# EAGLE board v1 (EAGLE 9.4.1)
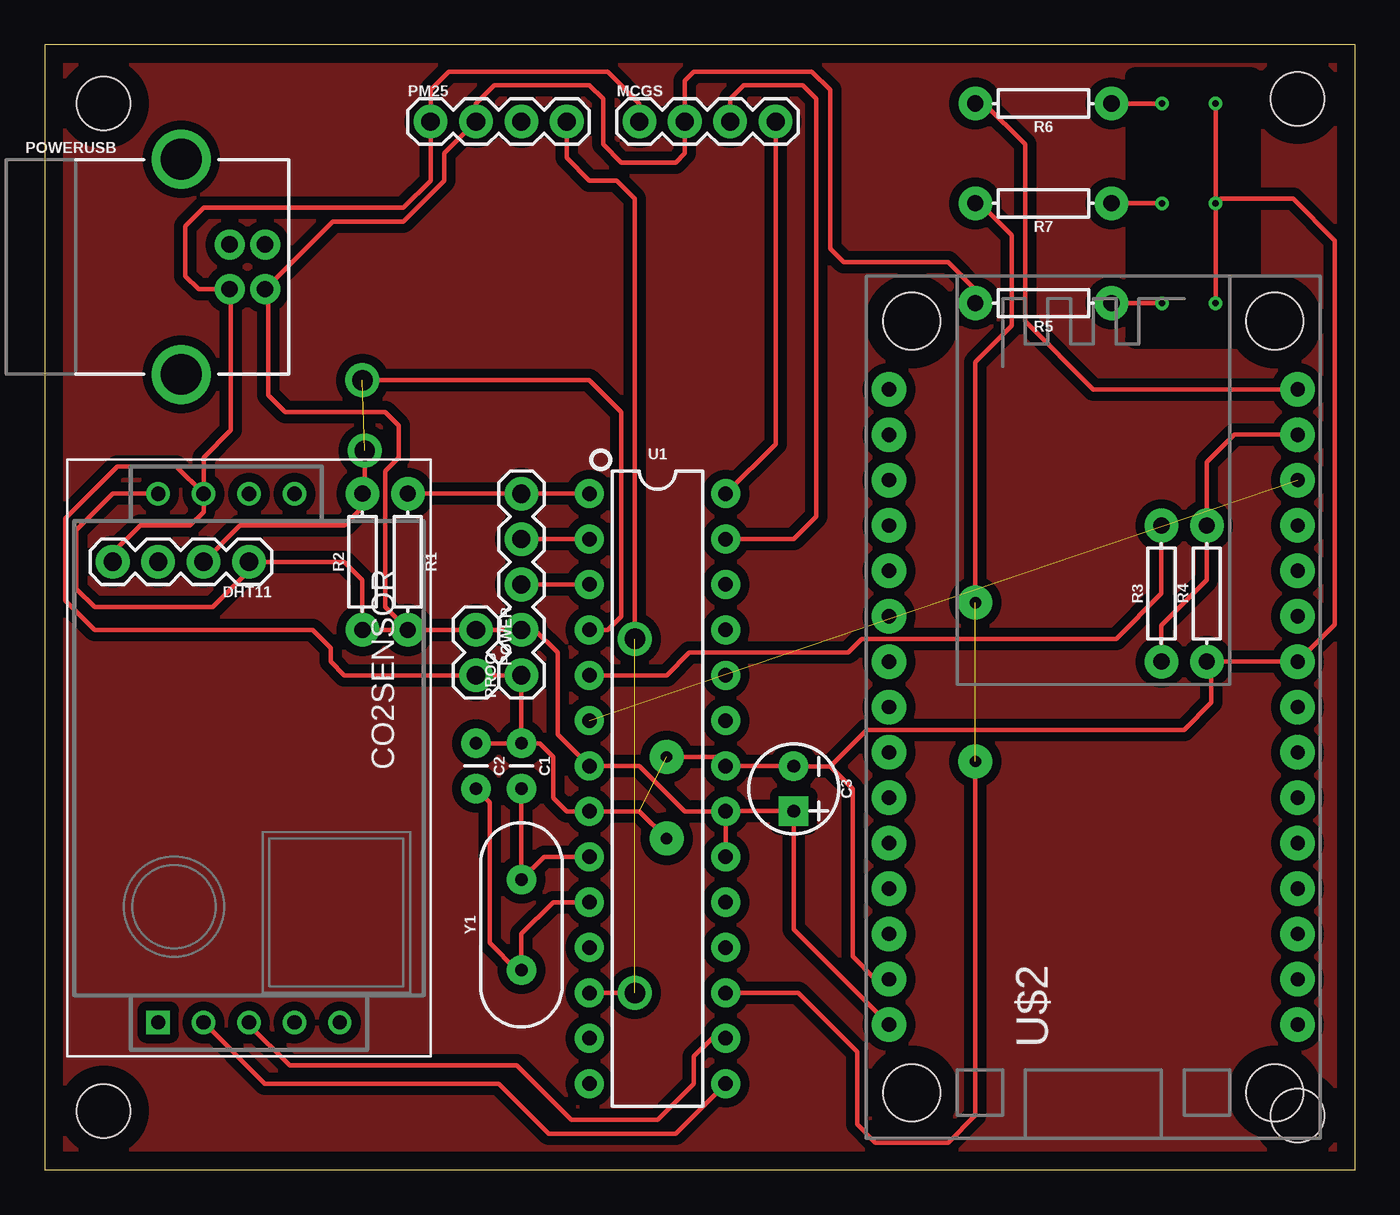
[diagram p0: board, top side]
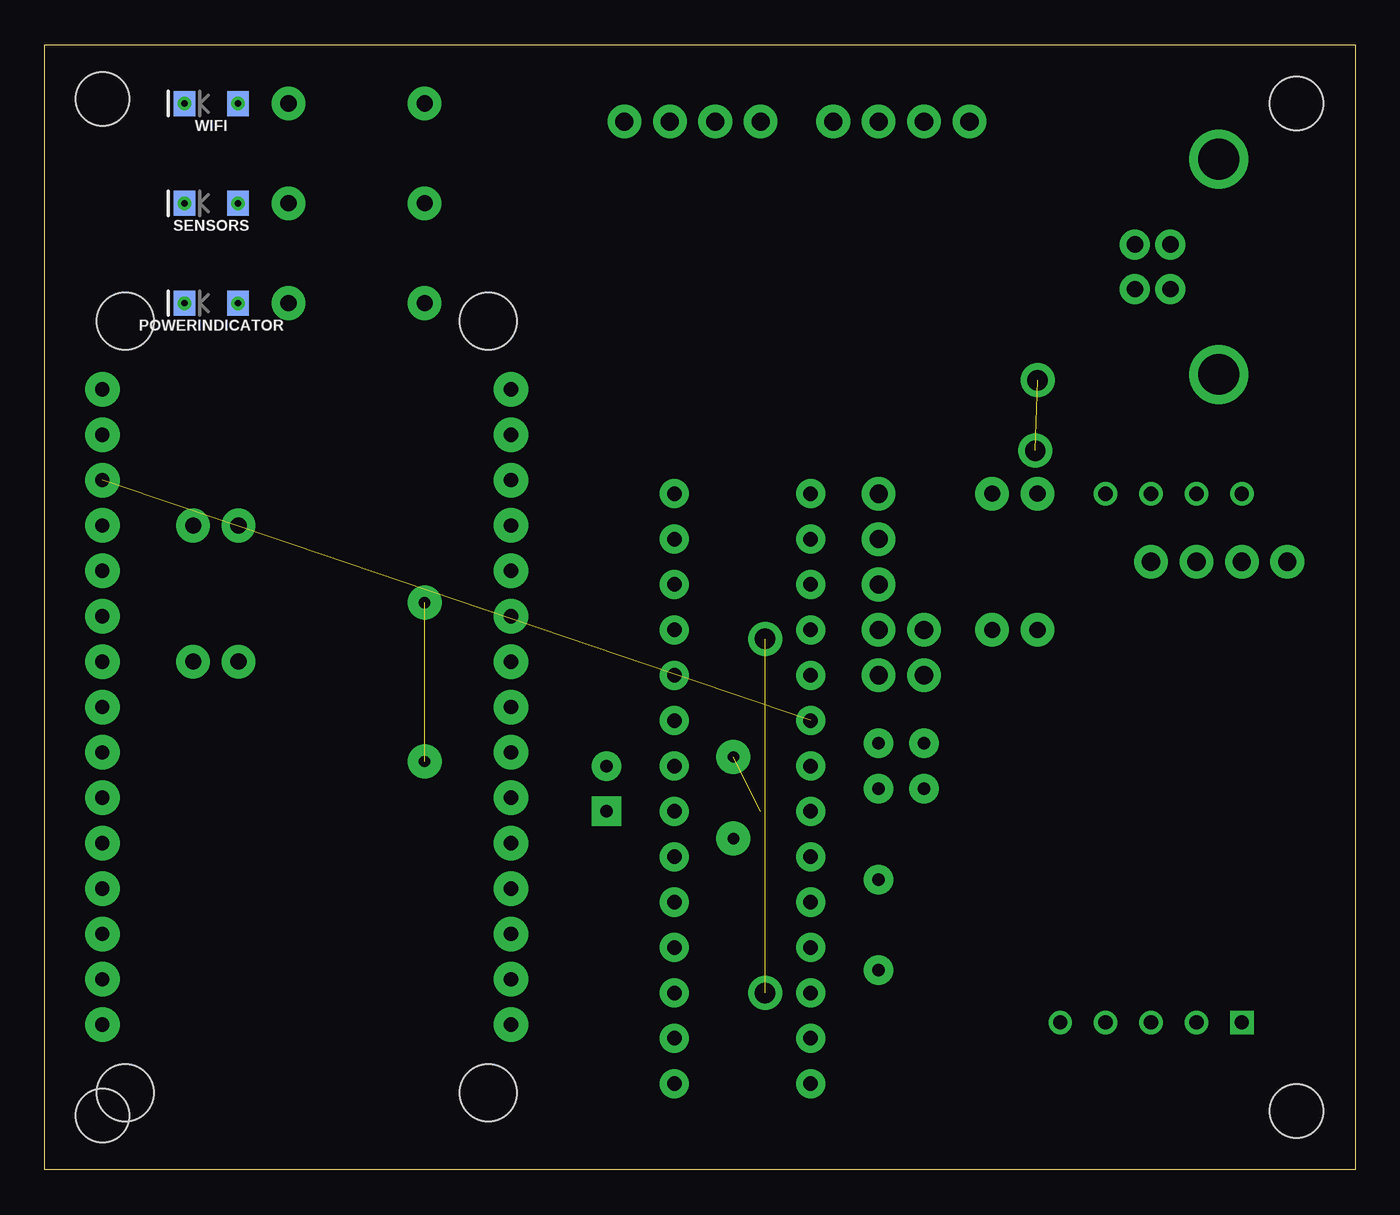
[diagram p1: board, bottom side, seen from below]

Size 73.33 x 62.98 mm. Coordinates in mm from the lower left corner, seen from the top.
Outline: 0,0 73.33,0 73.33,62.98 0,62.98 0,0
Copper layers (1*16): Top 0.035mm / dielectric 1.5mm / Bottom 0.035mm
Design rules "default": minimum track width 6mil, minimum drill 0.35mm, track to track 6mil, track to pad 6mil, pad to pad 6mil, via to via 6mil, smd to smd 6mil, copper to edge 40mil, drill to drill 6mil, minimum pad ring 10mil, minimum via ring 8mil, stop-mask expansion 4mil, vias tented up to drill 0mil, thermal gap 10mil
Holes 3 mm at 70.1,59.94 3.3,59.69 3.3,3.3 70.1,3.05
tRestrict: area 61,46.5 to 67.6,61.2

## Footprints (pad centres in the part's own frame; a part is rotated, then mirrored left to right if it is on the bottom)
CAP-PTH-2.54 = drill 0.7 pad 1.651: 1 -1.27,0; 2 1.27,0
CPOL-RADIAL-2.5MM-5MM = drill 0.7 pad 1.651 square: 1 1.25,0 | drill 0.7 pad 1.651: 2 -1.25,0
MH-Z19 = drill 0.8 square: 1 29.591,0 | drill 0.8: 2 29.591,2.54; 3 29.591,5.08; 4 29.591,7.62; 5 29.591,10.16; 6 0,0; 7 0,2.54; 8 0,5.08; 9 0,7.62
1X04 = drill 1.016 pad 1.88: 1 0,0; 2 2.54,0; 3 5.08,0; 4 7.62,0
1X02 = drill 1.016 pad 1.88: 1 0,0; 2 2.54,0
LED-1206 = smd 1.2 x 1.4: A -1.5,0; C 1.5,0
USB-B-PTH = drill 0.914 pad 1.676: D+ 4,1.25; D- 5.981,1.25; GND 4,-1.25; VBUS 5.981,-1.25 | drill 2.286: SHLD1 1.282,-6.02; SHLD2 1.282,6.02
1X05 = drill 1.016 pad 1.88: 1 0,0; 2 2.54,0; 3 5.08,0; 4 7.62,0; 5 10.16,0
AXIAL-0.3 = drill 0.9 pad 1.88: P$1 -3.81,0; P$2 3.81,0
DIP28 = drill 0.813 pad 1.626: 1 -16.51,-3.81; 2 -13.97,-3.81; 3 -11.43,-3.81; 4 -8.89,-3.81; 5 -6.35,-3.81; 6 -3.81,-3.81; 7 -1.27,-3.81; 8 1.27,-3.81; 9 3.81,-3.81; 10 6.35,-3.81; 11 8.89,-3.81; 12 11.43,-3.81; 13 13.97,-3.81; 14 16.51,-3.81; 15 16.51,3.81; 16 13.97,3.81; 17 11.43,3.81; 18 8.89,3.81; 19 6.35,3.81; 20 3.81,3.81; 21 1.27,3.81; 22 -1.27,3.81; 23 -3.81,3.81; 24 -6.35,3.81; 25 -8.89,3.81; 26 -11.43,3.81; 27 -13.97,3.81; 28 -16.51,3.81
ESP12E_DEVKIT = drill 0.8 pad 1.93: 3V3@0 -11.43,-7.62; 3V3@1 11.43,5.08; 3V3@2 11.43,-17.78; AD0 -11.43,17.78; CLK -11.43,-2.54; CMD -11.43,2.54; D0 11.43,17.78; D1 11.43,15.24; D2 11.43,12.7; D3 11.43,10.16; D4 11.43,7.62; D5 11.43,0; D6 11.43,-2.54; D7 11.43,-5.08; D8 11.43,-7.62; EN -11.43,-10.16; GND@0 -11.43,-5.08; GND@1 -11.43,-15.24; GND@2 11.43,2.54; GND@3 11.43,-15.24; RST -11.43,-12.7; RSV@0 -11.43,15.24; RSV@1 -11.43,12.7; RX 11.43,-10.16; SD0 -11.43,0; SD1 -11.43,5.08; SD2 -11.43,7.62; SD3 -11.43,10.16; TX 11.43,-12.7; VIN -11.43,-17.78 | hole 3.2: -10.16,21.59; 10.16,21.59; 10.16,-21.59; -10.16,-21.59
HC49US = drill 0.7 pad 1.651: 1 -2.54,0; 2 2.54,0

## Placement (x,y rotation side)
C1  22pF  [CAP-PTH-2.54]  26.67,22.61 270 top
C2  22pF  [CAP-PTH-2.54]  24.13,22.61 270 top
C3  10uF  [CPOL-RADIAL-2.5MM-5MM]  41.91,21.34 270 top
CO2SENSOR  MH-Z19-CO2-NDIR-SENSOR  [MH-Z19]  6.35,37.85 270 top
DHT11  [1X04]  11.43,34.04 180 top
MCGS  [1X04]  33.27,58.67 0 top
PM25  [1X04]  21.59,58.67 0 top
POWER  [1X02]  24.13,30.23 270 top
POWERINDICATOR  [LED-1206]  64.01,48.51 180 bottom
POWERUSB  USB_B_PTH  [USB-B-PTH]  6.35,50.55 0 top
PROG  [1X05]  26.67,27.69 90 top
R1  10k  [AXIAL-0.3]  20.32,34.04 270 top
R2  10k  [AXIAL-0.3]  17.78,34.04 90 top
R3  1k  [AXIAL-0.3]  62.48,32.26 90 top
R4  1.8k  [AXIAL-0.3]  65.02,32.26 90 top
R5  1k  [AXIAL-0.3]  55.88,48.51 180 top
R6  1k  [AXIAL-0.3]  55.88,59.69 180 top
R7  1k  [AXIAL-0.3]  55.88,54.1 180 top
SENSORS  [LED-1206]  64.01,54.1 180 bottom
U1  328P  [DIP28]  34.29,21.34 270 top
U$2  ESP12E_DEVKIT  [ESP12E_DEVKIT]  58.67,25.91 0 top
WIFI  [LED-1206]  64.01,59.69 180 bottom
Y1  16MHz  [HC49US]  26.67,13.72 90 top

## Library data of the parts
C1 C2 = SparkFun-Capacitors; PROD_ID: CAP-09128
C3 = SparkFun-Capacitors; PROD_ID: CAP-08440
CO2SENSOR = mh-z19
DHT11 MCGS PM25 = SparkFun-Connectors; PROD_ID: CONN-09696
POWER PROG = SparkFun-Connectors
POWERINDICATOR SENSORS WIFI = SparkFun-LED
POWERUSB = SparkFun-Connectors; PROD_ID: CONN-08278; SF_ID: PRT-00139
R1-R4 R6 R7 = SparkFun-Resistors; PROD_ID: RES-12183
R5 = SparkFun-Resistors; PROD_ID: RES-12182
U1 = SparkFun-IC-Microcontroller; PROD_ID: IC-09136
U$2 = ESP12E_DEVKIT
Y1 = SparkFun-Clocks; PROD_ID: XTAL-08181; SF_ID: COM-00536

## Nets
5V: C3.1 CO2SENSOR.6 DHT11.1 MCGS.2 PM25.2 POWER.1 POWERUSB.VBUS PROG.2 R1.P$2 R2.P$1 R5.P$2 U1.7 U1.20 U1.21 U$2.VIN
GND: C1.1 C2.1 C3.2 CO2SENSOR.7 DHT11.4 MCGS.1 PM25.1 POWER.2 POWERINDICATOR.C POWERUSB.GND PROG.1 R4.P$1 SENSORS.C U1.8 U1.22 U$2.GND@1 U$2.GND@2 WIFI.C
N$1: PROG.4 U1.2
N$2: PROG.5 R1.P$1 U1.1
N$3: PROG.3 U1.3
N$4: C1.2 U1.9 Y1.2
N$5: C2.2 U1.10 Y1.1
N$6: PM25.4 U1.12
N$7: DHT11.2 R2.P$2 U1.4
N$8: MCGS.3 U1.27
N$9: MCGS.4 U1.28
N$10: R3.P$2 U1.5
N$11: U1.6 U$2.D2
N$12: CO2SENSOR.2 U1.15
N$13: CO2SENSOR.3 U1.16
N$14: R3.P$1 R4.P$2 U$2.D1
N$15: POWERINDICATOR.A R5.P$1
N$16: R6.P$2 U$2.D0
N$17: R6.P$1 WIFI.A
N$18: R7.P$2 U1.17
N$19: R7.P$1 SENSORS.A
VO: CO2SENSOR.1

## Tracks (layer width: path | path; a pad name or v marks a point on that pad's centre or on a via)
5V
  Top 0.254: U1.21 U1.20 | CO2SENSOR.6 3.81,37.85 1.78,35.81 1.78,32.51 2.79,31.5 9.4,31.5 11.43,33.53 DHT11.1 16.76,34.04 17.78,33.02 R2.P$1 R1.P$2 | R1.P$2 POWER.1 PROG.2 27.43,30.23 28.7,28.96 28.7,24.38 U1.7 33.27,22.61 35.81,20.07 U1.21 | R1.P$2 19.05,31.5 19.05,39.12 19.81,39.88 19.81,41.66 19.05,42.42 13.46,42.42 12.51,43.37 12.51,49.47 | POWERUSB.VBUS 12.51,49.47 | 12.51,49.47 16.12,53.09 20.07,53.09 22.35,55.37 22.35,56.9 PM25.2 24.13,59.69 25.15,60.71 30.48,60.71 31.24,59.94 31.24,57.4 32.26,56.39 35.31,56.39 35.81,56.9 MCGS.2 35.81,60.96 36.32,61.47 42.93,61.47 43.94,60.45 43.94,51.56 44.7,50.8 50.55,50.8 52.07,49.28 R5.P$2 | U1.21 38.12,20.09 C3.1 41.91,13.46 U$2.VIN
GND  (via drill 0.35, 0.64 pad 1.91)  (1 unrouted)
  Top 0.254: C2.1 C1.1 | C1.1 PROG.1 POWER.2 16.76,27.69 16,28.45 16,29.21 14.99,30.23 2.79,30.23 1.14,31.88 1.14,36.45 4.06,39.37 7.37,39.37 CO2SENSOR.7 | C1.1 27.69,23.88 28.45,23.11 28.45,20.83 29.21,20.07 U1.8 33.27,20.07 v34.8,18.54 | DHT11.4 3.81,34.54 5.33,36.07 8.13,36.07 8.89,36.83 CO2SENSOR.7 | CO2SENSOR.7 8.89,39.88 10.41,41.4 10.41,49.23 POWERUSB.GND 8.62,49.3 7.87,50.04 7.87,52.83 8.89,53.85 20.07,53.85 21.59,55.37 PM25.1 21.59,60.45 22.61,61.47 31.5,61.47 33.27,59.69 MCGS.1 | 43.96,22.59 C3.2 41.89,22.61 U1.22 37.59,23.11 v34.8,23.11 | 43.96,22.59 45.21,21.34 45.21,11.94 46.48,10.67 U$2.GND@1 | R4.P$1 65.28,28.45 | 65.28,28.45 U$2.GND@2 72.19,30.53 72.19,52.02 69.85,54.36 65.81,54.36 65.53,54.08 | 43.96,22.59 45.97,24.6 45.97,24.64 63.75,24.64 65.28,26.16 65.28,28.45 | WIFI.C 65.53,59.67 65.53,54.1 SENSORS.C 65.53,54.08 | 65.53,54.08 65.53,48.51 POWERINDICATOR.C
  other vias: 65.51,59.69 65.51,54.1 65.51,54.1 65.51,48.51
N$1
  Top 0.254: PROG.4 U1.2
N$2
  Top 0.254: U1.1 26.92,37.85 PROG.5 R1.P$1
N$3
  Top 0.254: PROG.3 U1.3
N$4
  Top 0.254: U1.9 27.94,17.53 Y1.2 C1.2
N$5
  Top 0.254: U1.10 28.45,14.99 26.67,13.21 Y1.1 26.42,11.18 24.89,12.7 24.89,20.57 C2.2
N$6  (via drill 1.14 pad 1.91)  (1 unrouted)
  Top 0.254: PM25.4 29.21,56.64 30.48,55.37 32,55.37 33.02,54.36 v33.02,29.72 | v33.02,9.91 U1.12
N$7  (via drill 1.14 pad 1.91)  (1 unrouted)
  Top 0.254: DHT11.2 10.92,36.07 16.76,36.07 17.78,37.08 17.78,37.59 | 17.78,37.59 R2.P$2 | U1.4 31.5,30.23 32.26,30.99 32.26,42.42 30.48,44.2 v17.78,44.2 | v17.91,40.26 17.91,37.72 17.78,37.59
N$8
  Top 0.254: MCGS.3 38.35,59.94 39.12,60.71 42.42,60.71 43.18,59.94 43.18,36.58 41.91,35.31 U1.27
N$9
  Top 0.254: MCGS.4 40.89,40.64 U1.28
N$10
  Top 0.254: U1.5 34.8,27.69 36.07,28.96 44.96,28.96 45.72,29.72 59.94,29.72 62.48,32.26 R3.P$2
N$11  (1 unrouted)
N$12
  Top 0.254: CO2SENSOR.2 12.32,4.83 25.4,4.83 28.19,2.03 35.31,2.03 U1.15
N$13
  Top 0.254: CO2SENSOR.3 11.43,8.13 13.72,5.84 26.42,5.84 29.46,2.79 34.29,2.79 36.32,4.83 36.32,6.35 37.34,7.37 U1.16
N$14
  Top 0.254: R3.P$1 62.48,30.48 65.02,33.02 R4.P$2 65.02,39.62 66.55,41.15 U$2.D1
N$15  (via drill 0.35)
  Top 0.254: POWERINDICATOR.A R5.P$1
  other vias: 62.51,48.51
N$16
  Top 0.254: R6.P$2 52.58,59.69 54.86,57.4 54.86,47.5 58.67,43.69 U$2.D0
N$17  (via drill 0.35)
  Top 0.254: R6.P$1 WIFI.A
  other vias: 62.51,59.69
N$18  (via drill 0.64 pad 1.91)  (1 unrouted)
  Top 0.254: U1.17 42.16,9.91 45.47,6.6 45.47,2.54 46.48,1.52 50.55,1.52 52.07,3.05 v52.07,22.86 | v52.07,31.75 52.07,45.21 54.1,47.24 54.1,52.32 52.32,54.1 R7.P$2
N$19  (via drill 0.35)
  Top 0.254: R7.P$1 SENSORS.A
  other vias: 62.51,54.1
NEW
  pour Top (isolate 0.508): 0,63.25 73.66,63.25 73.66,-0.25 0,-0.25